# Altium PCB PCB_all.PcbDoc (part 4 of 5)
Units mm, origin at the board's own origin, x right, y up, seen from the top; angles counter-clockwise.
Board outline 345 x 232.5 mm, 2 copper layers (Top Layer, Bottom Layer); 484 components, 419 nets, 1569 pads, 736 vias.
Unrouted connection lines stored in the file: 51.
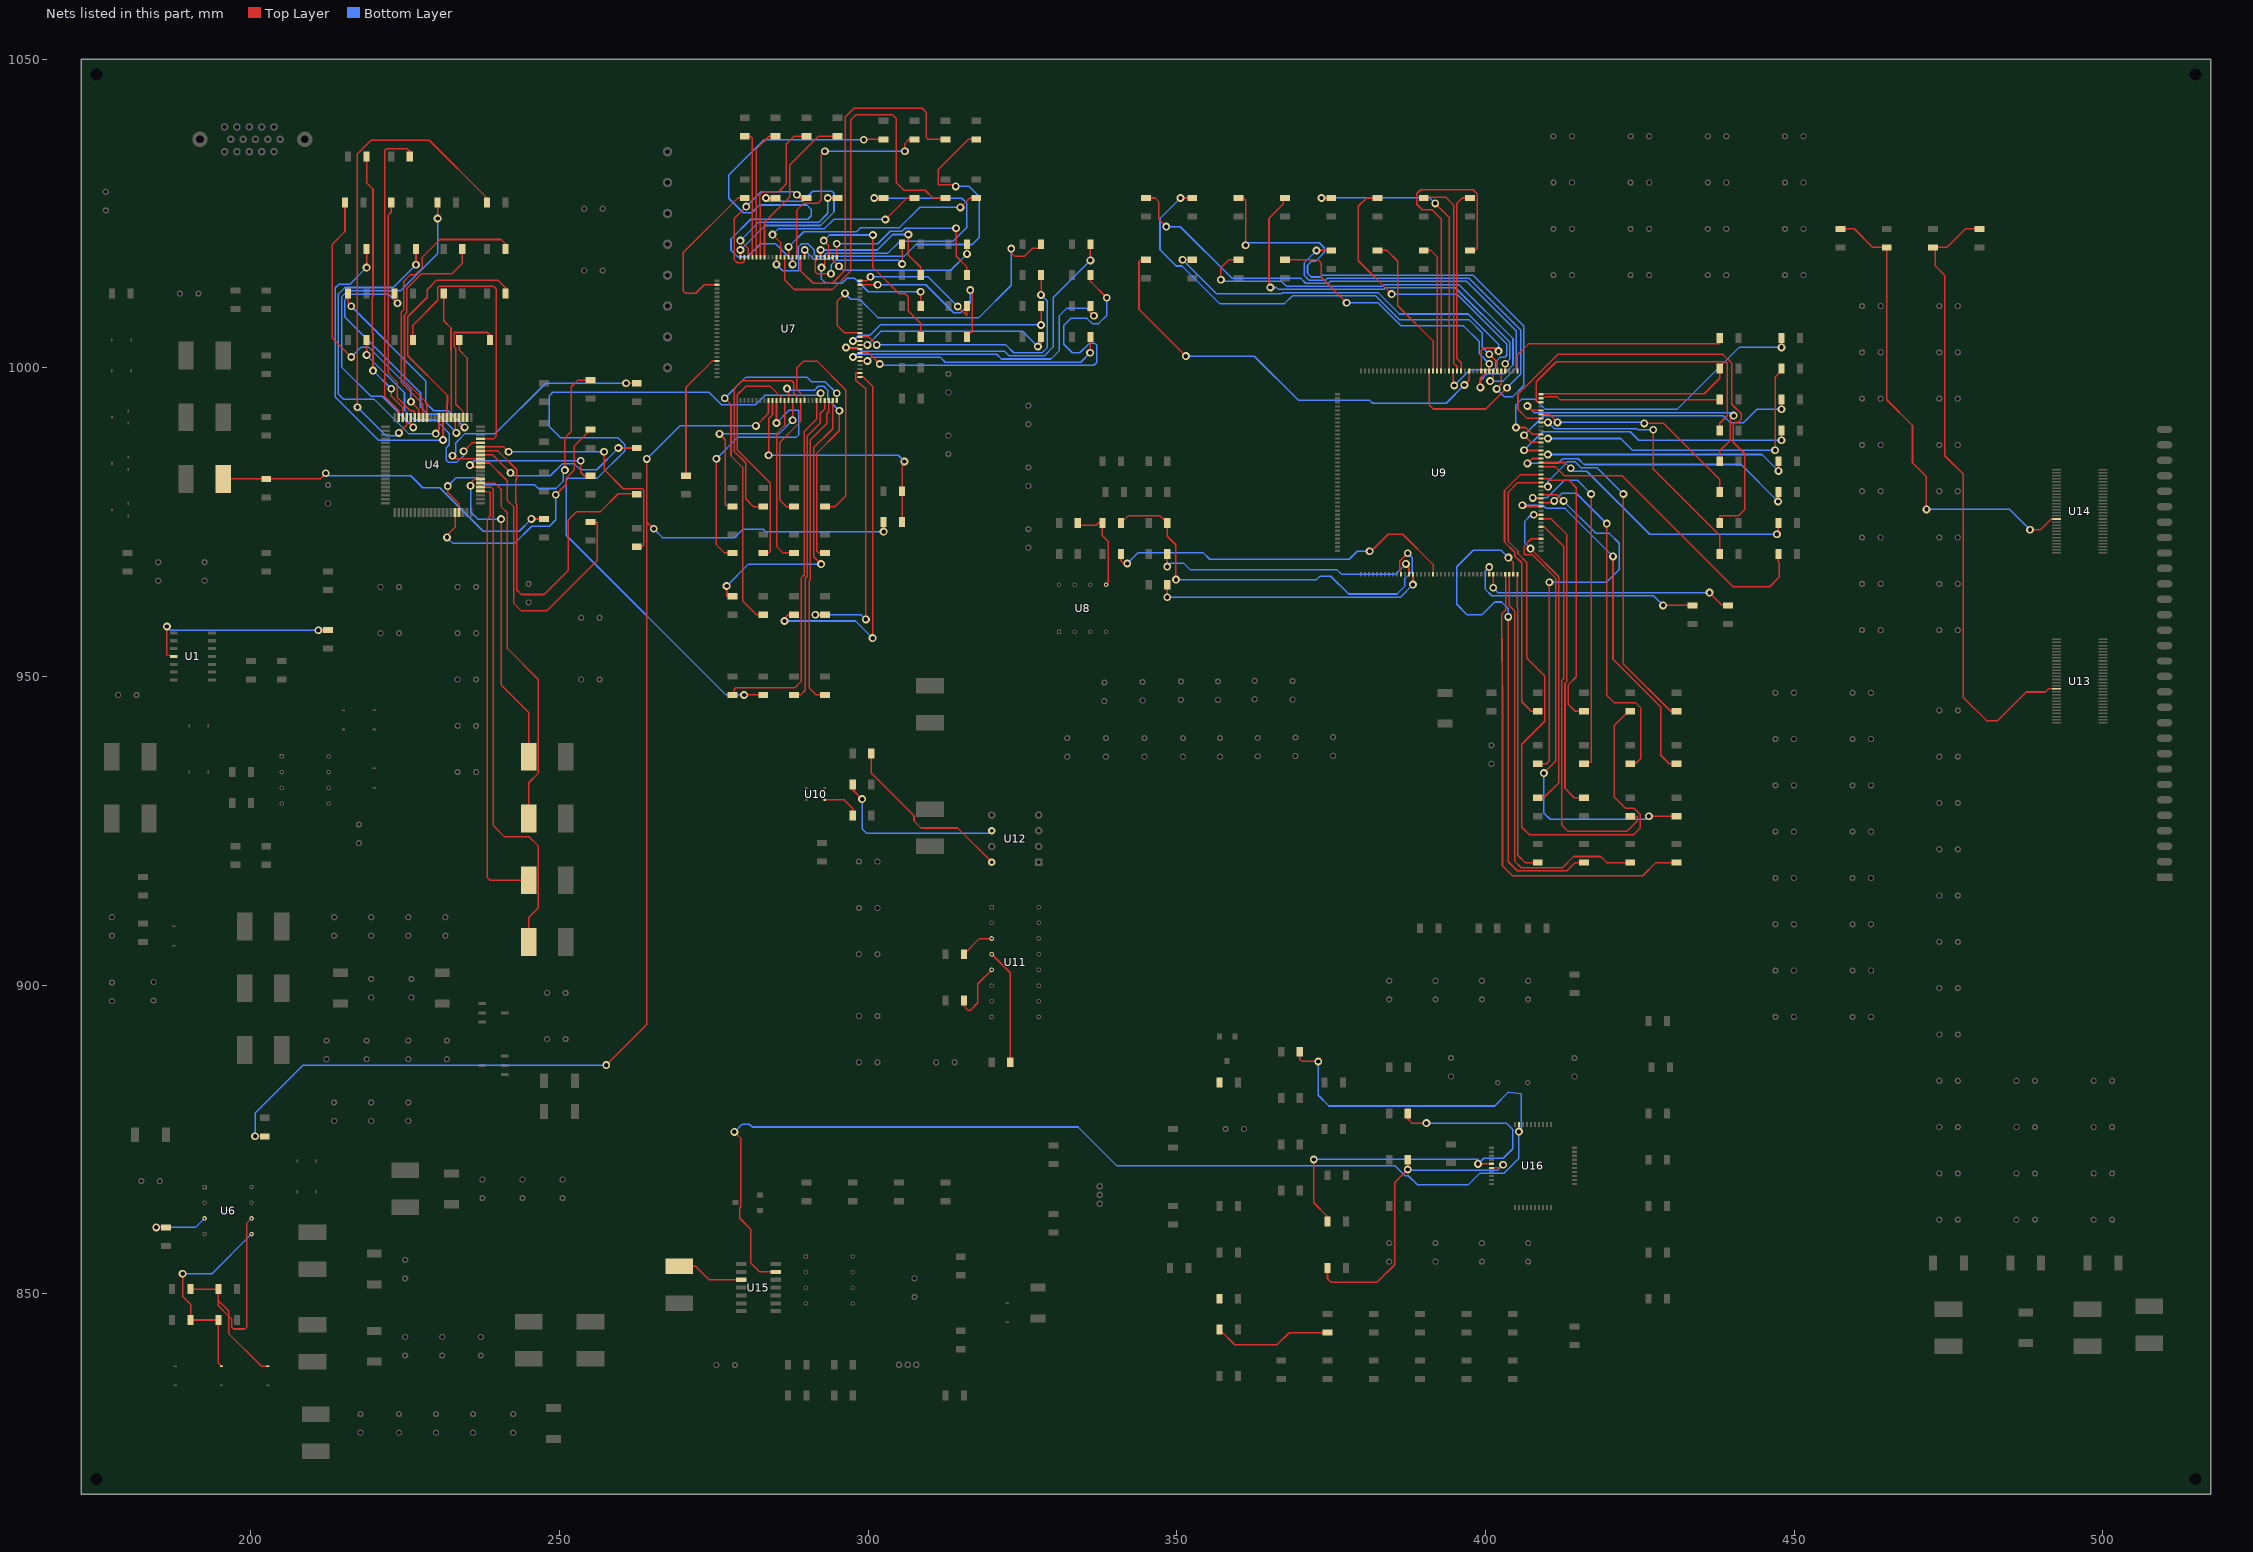
[diagram p4: the nets of this part, all layers, seen from the top]

## Via types
v1: diameter 1.27, hole 0.711, Top Layer to Bottom Layer, 736 vias

## Nets (pads, with @x,y where several pads share a name; then routed paths per layer and width w, separated by ;. In a path a pad name is that pad's centre, name@x,y a point inside that pad or via, vN(x,y) a via of type N, cw(c..) or ccw(c..) an arc to the next point about the centre after c; other vN are vias at no path point) (continued)
NetL6_2: L6.2 R17.2 R21.1 | length 57.1
  Top Layer w0.25: L6.2@195.5,982 R17.2@202.5,982 211.237,982 v1(212.141,982.904) ; v1(245.44,975.512) 245.453,975.5 R21.1@247.5,975.5
  Bottom Layer w0.25: v1(212.141,982.904) 212.524,982.521 225.882,982.521 227.836,980.567 230.607,980.567 237.642,973.531 243.459,973.531 v1(245.44,975.512)
NetL8_1: L8.1 U4.67 | length 52.3
  Top Layer w0.25: v1(235.585,980.875) 235.585,981.307 236.253,981.975 U4.67@237.222,981.975 ; v1(240.538,975.487) 240.538,948.639 245,944.177 L8.1@245,937
  Bottom Layer w0.25: v1(235.585,980.875) 235.585,976.663 236.761,975.487 v1(240.538,975.487)
NetL9_1: L9.1 U4.66 | length 60.2
  Top Layer w0.25: U4.66@237.222,981.325 239.547,981.325 240.538,980.334 240.538,977.515 241.552,976.501 241.552,954.509 246.583,949.477 246.583,934.364 245,932.781 L9.1@245,927
NetL10_1: L10.1 U4.64 | length 71
  Top Layer w0.25: U4.64@237.222,980.025 238.785,979.8 238.785,976.028 238.328,975.571 238.328,917.423 238.76,916.991 245,916.991 L10.1@245,917
NetL11_1: L11.1 U4.65 | length 81.5
  Top Layer w0.25: U4.65@237.222,980.675 238.881,980.675 239.293,980.262 239.293,925.805 241.097,924.001 245.11,924.001 246.583,922.528 246.583,912.529 245,910.946 L11.1@245,907
NetL24_2: L24.2 U15.3 | length 10.9
  Top Layer w0.25: L24.2@269.4,854.46 272.009,854.46 274.199,852.27 U15.3@279.4,852.27
NetR11_1: R11.1 U1.4 | length 32.1
  Top Layer w0.25: v1(186.392,958.088) 186.392,953.516 U1.4@187.5,953.23 ; v1(210.947,957.478) 210.969,957.5 R11.1@212.5,957.5
  Bottom Layer w0.25: v1(186.392,958.088) 187.001,957.478 v1(210.947,957.478)
NetR23_2: R23.2 U4.57 | length 44.9
  Top Layer w0.25: v1(231.902,980.821) 231.902,979.805 233.725,977.982 U4.57@233.725,976.528 ; v1(250.876,983.412) 250.876,988.622 251.907,989.654 251.907,996.923 252.984,998 R23.2@255,998
  Bottom Layer w0.25: v1(231.902,980.821) 233.284,982.203 236.743,982.203 237.932,981.014 245.976,981.014 246.55,980.44 249.428,980.44 250.579,981.591 250.579,983.115 v1(250.876,983.412)
NetR24_2: R24.2 U4.56 | length 41.3
  Top Layer w0.25: v1(231.775,972.515) 231.775,972.866 233.075,974.166 U4.56@233.075,976.528 ; v1(249.377,979.424) 251.083,981.13 251.083,982.125 252.4,983.442 252.4,987.323 254.711,989.635 254.711,990 R24.2@255,990
  Bottom Layer w0.25: v1(231.775,972.515) 232.74,971.55 242.722,971.55 245.516,974.344 248.361,974.344 249.377,975.36 v1(249.377,979.424)
NetR25_1: R25.1 U4.70 | length 23.8
  Top Layer w0.25: v1(235.483,984.225) 235.783,983.925 U4.70@237.222,983.925 ; v1(253.441,984.93) 253.441,983.059 254,982.5 R25.1@255,982.5
  Bottom Layer w0.25: v1(235.483,984.225) 236.189,984.93 v1(253.441,984.93)
NetR26_1: R26.1 U4.71 | length 50.5
  Top Layer w0.25: U4.71@237.222,984.575 238.67,984.575 241.551,981.694 241.551,978.518 242.56,977.509 242.56,961.897 243.84,960.617 247.918,960.617 256.134,968.832 256.134,975 R26.1@255,975
NetR27_1: R27.1 U4.72 | length 40.4
  Top Layer w0.25: v1(232.664,985.749) 233.172,985.241 236.601,985.241 236.601,985.225 U4.72@237.222,985.225 ; v1(260.782,997.5) R27.1@262.5,997.5
  Bottom Layer w0.25: v1(232.664,985.749) 233.172,986.257 233.172,987.816 234.688,989.332 239.584,989.332 247.752,997.5 v1(260.782,997.5)
NetR28_1: R28.1 U4.73 | length 29.3
  Top Layer w0.25: U4.73@237.222,985.875 239.167,985.875 v1(242.062,982.98) ; v1(259.537,987) R28.1@262.5,987
  Bottom Layer w0.25: v1(242.062,982.98) 242.554,982.488 248.506,982.488 250.444,984.426 252.44,984.426 253.378,983.488 256.025,983.488 v1(259.537,987)
NetR29_1: R29.1 U4.74 | length 58.1
  Top Layer w0.25: U4.74@237.222,986.525 240.039,986.525 243.076,983.488 243.076,982.022 242.9,981.846 242.9,978.013 243.064,977.849 243.064,964.048 243.84,963.272 247.515,963.272 251.435,967.192 251.435,975.36 252.781,976.706 256.642,976.706 259.51,979.574 261.825,979.574 261.825,979.5 R29.1@262.5,979.5
NetR30_1: R30.1 U4.75 | length 41.1
  Top Layer w0.25: U4.75@237.222,987.175 240.966,987.175 v1(241.757,986.384) ; v1(257.226,986.384) 257.226,983.511 260.321,980.417 263.396,980.417 263.627,980.186 263.627,971.296 263.331,971 R30.1@262.5,971
  Bottom Layer w0.25: v1(241.757,986.384) v1(257.226,986.384)
NetR31_1: R31.1 U4.76 | length 34.7
  Top Layer w0.25: v1(218.75,1002.081) R31.1@218.75,1004.5 ; v1(234.467,986.485) 235.807,987.825 U4.76@237.222,987.825
  Bottom Layer w0.25: v1(218.75,1002.081) 224.892,995.939 224.892,993.14 226.492,991.54 229.972,991.54 232.156,989.355 232.156,987.527 231.648,987.019 231.648,985.018 232.007,984.659 233.321,984.659 234.467,985.805 v1(234.467,986.485)
NetR32_1: R32.1 U4.77 | length 46.4
  Top Layer w0.25: R32.1@226.25,1004.5 226.25,1006.894 230.276,1010.92 230.276,1012.952 230.556,1013.231 239.268,1013.231 239.72,1012.779 239.72,988.893 239.302,988.475 U4.77@237.222,988.475
NetR33_1: R33.1 U4.2 | length 13.1
  Top Layer w0.25: R33.1@233.75,1004.5 233.75,1002.874 235.025,1001.599 U4.2@235.025,991.972
NetR34_1: R34.1 U4.3 | length 21.2
  Top Layer w0.25: U4.3@234.375,991.972 234.375,992.902 233.172,994.105 233.172,1003.129 232.925,1003.376 232.925,1005.713 238.369,1005.713 238.75,1005.332 R34.1@238.75,1004.5
NetR35_1: R35.1 U4.4 | length 33.1
  Top Layer w0.25: R35.1@215.75,1012 215.75,1010.46 v1(216.256,1009.955) ; U4.4@233.725,991.972 233.725,990.733 234.112,990.346 v1(234.62,990.346)
  Bottom Layer w0.25: v1(216.256,1009.955) 228.346,997.864 228.346,994.308 229.616,993.038 231.927,993.038 v1(234.62,990.346)
NetR36_1: R36.1 U4.5 | length 43.9
  Top Layer w0.25: R36.1@223.25,1012 223.25,1010.936 v1(223.749,1010.437) ; U4.5@233.075,991.972 233.075,989.681 v1(233.299,989.457)
  Bottom Layer w0.25: v1(223.749,1010.437) 222.251,1011.935 216.208,1011.935 215.242,1010.969 215.242,1008.197 227.482,995.956 227.482,993.623 228.6,992.505 230.251,992.505 v1(233.299,989.457)
NetR37_1: R37.1 U4.6 | length 20.5
  Top Layer w0.25: R37.1@231.25,1012 231.25,1007.618 232.421,1006.447 232.421,1002.871 232.425,1002.867 U4.6@232.425,991.972
NetR38_1: R38.1 U4.7 | length 39.5
  Top Layer w0.25: U4.7@231.775,991.972 231.775,994.207 231.855,994.287 231.855,995.491 225.4,1001.947 225.4,1008.253 228.556,1011.41 228.556,1012.629 230.124,1014.197 240.005,1014.197 241.25,1012.952 R38.1@241.25,1012
NetR39_1: R39.1 U4.8 | length 51.1
  Top Layer w0.25: v1(218.75,1016.229) R39.1@218.75,1019.25 ; v1(231.125,988.289) U4.8@231.125,991.972
  Bottom Layer w0.25: v1(218.75,1016.229) 216.023,1013.502 214.238,1013.502 213.688,1012.952 213.688,995.25 220.65,988.289 v1(231.125,988.289)
NetR40_1: R40.1 U4.9 | length 54.6
  Top Layer w0.25: v1(226.75,1016.686) R40.1@226.75,1019.25 ; v1(229.948,989.332) 230.475,989.859 U4.9@230.475,991.972
  Bottom Layer w0.25: v1(226.75,1016.686) 223.062,1012.998 215.246,1012.998 214.192,1011.944 214.192,995.709 215.029,994.873 220.011,994.873 225.552,989.332 v1(229.948,989.332)
NetR41_1: R41.1 U4.12 | length 35.5
  Top Layer w0.25: U4.12@228.525,991.972 228.525,994.307 224.892,997.941 224.892,1008.544 225.267,1008.919 225.267,1012.824 227.651,1015.209 232.584,1015.209 234.25,1016.875 R41.1@234.25,1019.25
NetR42_1: R42.1 U4.13 | length 45
  Top Layer w0.25: U4.13@227.875,991.972 227.875,994.094 224.384,997.585 224.384,1009.044 224.763,1009.423 224.763,1013.968 225.88,1015.086 226.616,1015.086 227.787,1016.257 227.787,1017.93 230.632,1020.775 240.539,1020.775 241.25,1020.064 R42.1@241.25,1019.25
NetR43_1: R43.1 U4.14 | length 45.3
  Top Layer w0.25: R43.1@215.25,1026.75 215.25,1022.059 213.216,1020.025 213.216,1004.79 v1(216.256,1001.751) ; v1(225.933,994.486) 227.225,993.194 U4.14@227.225,991.972
  Bottom Layer w0.25: v1(216.256,1001.751) 217.805,1003.3 219.126,1003.3 225.933,996.493 v1(225.933,994.486)
NetR44_1: R44.1 U4.15 | length 37.1
  Top Layer w0.25: R44.1@222.75,1026.75 222.75,1025.195 222.225,1024.669 222.225,999.13 223.747,997.608 223.747,995.126 225.834,993.038 226.314,993.038 226.575,992.777 U4.15@226.575,991.972
NetR45_1: R45.1 U4.16 | length 55.5
  Top Layer w0.25: U4.16@225.925,991.972 225.925,990.735 v1(226.314,990.346) ; v1(230.25,1024.179) R45.1@230.25,1026.75
  Bottom Layer w0.25: v1(226.314,990.346) 221.283,995.377 219.456,995.377 214.696,1000.136 214.696,1011.473 215.662,1012.439 224.205,1012.439 230.25,1018.484 v1(230.25,1024.179)
NetR46_1: R46.1 U4.17 | length 79.6
  Top Layer w0.25: v1(217.272,993.597) 217.272,1010.417 217.228,1010.461 217.228,1034.625 219.456,1036.853 228.903,1036.853 238.25,1027.506 R46.1@238.25,1026.75 ; v1(223.977,989.457) 225.275,990.755 U4.17@225.275,991.972
  Bottom Layer w0.25: v1(217.272,993.597) 221.92,988.949 223.596,988.949 223.977,989.33 v1(223.977,989.457)
NetR47_1: R47.1 U4.18 | length 44.8
  Top Layer w0.25: R47.1@218.75,1034.25 218.75,1029.965 219.786,1028.929 219.786,1011.53 219.685,1011.428 219.685,1005.662 219.786,1005.561 v1(219.786,999.541) ; v1(222.733,996.594) 222.733,995.427 224.625,993.534 U4.18@224.625,991.972
  Bottom Layer w0.25: v1(219.786,999.541) v1(222.733,996.594)
NetR48_1: R48.1 U4.19 | length 49.3
  Top Layer w0.25: U4.19@223.975,991.972 223.975,993.038 221.717,995.297 221.717,1035.228 221.996,1035.507 225.298,1035.507 225.75,1035.055 R48.1@225.75,1034.25
NetR49_2: R49.2 U6.3 | length 10
  Top Layer w0.25: v1(184.683,860.755) 184.689,860.75 R49.2@186.25,860.75
  Bottom Layer w0.25: v1(184.683,860.755) 191.045,860.755 U6.3@192.5,862.21
NetR50_1: R50.1 R52.2 U6.6 ZD7.2 | length 46.7
  Top Layer w0.25: R50.1@190.25,850.75 R52.2@194.75,850.75 194.75,848.885 ; U6.6@200.12,862.21 199.365,861.455 199.365,844.626 199.034,844.296 197.206,844.296 196.901,844.601 196.901,845.904 196.393,846.412 ; ZD7.2@202.75,838.25 201.713,838.25 196.393,843.57 196.393,846.412 ; 194.75,848.885 194.75,848.055 196.393,846.412 ; 194.75,848.885 196.393,847.242 196.393,846.412
NetR51_1: R51.1 R53.2 U6.5 ZD8.2 | length 34.1
  Top Layer w0.25: v1(188.951,853.237) 188.951,849.558 190.25,848.258 R51.1@190.25,845.75 R53.2@194.75,845.75 194.75,838.75 ZD8.2@195.25,838.25
  Bottom Layer w0.25: v1(188.951,853.237) 193.687,853.237 U6.5@200.12,859.67
NetR54_1: R54.1 U7.77 | length 26
  Top Layer w0.25: U7.77@275.5,1013.45 273.458,1013.45 272.078,1012.07 270.424,1012.07 270.05,1012.444 270.05,1018.658 278.892,1027.5 R54.1@280,1027.5
NetR55_1: R55.1 U7.75 | length 35.5
  Top Layer w0.25: U7.75@279.3,1017.9 v1(279.3,1019.073) ; v1(283.439,1027.506) 283.445,1027.5 R55.1@285,1027.5
  Bottom Layer w0.25: v1(279.3,1019.073) 283.272,1023.046 292.262,1023.046 294.462,1025.246 294.462,1028.243 294.132,1028.573 291.008,1028.573 289.408,1026.973 283.972,1026.973 v1(283.439,1027.506)
NetR56_1: R56.1 R62.2 U7.8 | length 232.9
  Top Layer w0.25: v1(200.685,875.513) 200.698,875.5 R56.1@202.25,875.5 ; v1(257.556,887.044) 264.135,893.623 264.135,975.03 ; v1(264.135,985.241) 264.135,975.03 ; v1(265.252,973.912) 264.135,975.03 ; v1(281.813,990.575) 283.85,992.612 U7.8@283.85,994.7 ; v1(302.489,973.455) 302.5,973.466 R62.2@302.5,975
  Bottom Layer w0.25: v1(200.685,875.513) 200.685,879.246 208.483,887.044 v1(257.556,887.044) ; v1(264.135,985.241) 269.469,990.575 v1(281.813,990.575) ; v1(265.252,973.912) 266.675,972.49 278.384,972.49 279.73,973.836 282.981,973.836 283.362,973.455 v1(302.489,973.455)
NetR57_1: R57.1 R62.1 U7.9 | length 41.5
  Top Layer w0.25: v1(283.87,985.825) 283.87,991.755 284.5,992.384 U7.9@284.5,994.7 ; R62.1@305.5,975 R57.1@305.5,980 305.5,984.442 v1(305.867,984.809)
  Bottom Layer w0.25: v1(283.87,985.825) 304.851,985.825 v1(305.867,984.809)
NetR58_1: R58.1 U7.74 | length 23.2
  Top Layer w0.25: U7.74@279.95,1017.9 279.95,1017.27 279.696,1017.016 278.79,1017.016 278.282,1017.524 278.282,1024.153 v1(280.238,1026.109) ; v1(288.442,1028.014) 288.957,1027.5 R58.1@290,1027.5
  Bottom Layer w0.25: v1(280.238,1026.109) 282.651,1028.522 287.934,1028.522 v1(288.442,1028.014)
NetR59_2: R59.2 U7.96 | length 21.1
  Top Layer w0.25: R59.2@270.5,982.5 270.485,982.5 270.485,996.823 274.762,1001.1 U7.96@275.5,1001.1
NetR60_1: R60.1 U7.73 | length 23.3
  Top Layer w0.25: v1(279.298,1020.597) 280.6,1019.296 U7.73@280.6,1017.9 ; v1(293.446,1027.5) R60.1@295,1027.5
  Bottom Layer w0.25: v1(279.298,1020.597) 282.251,1023.55 291.984,1023.55 293.446,1025.012 v1(293.446,1027.5)
NetR61_1: R61.1 U7.72 | length 20.7
  Top Layer w0.25: R61.1@280,1037.5 280.924,1037.5 281.252,1037.172 281.252,1025.097 281.25,1025.095 U7.72@281.25,1017.9
NetR63_1: R63.1 U7.71 | length 21.5
  Top Layer w0.25: U7.71@281.9,1017.9 281.9,1035.428 283.972,1037.5 R63.1@285,1037.5
NetR64_1: R64.1 U7.70 | length 25.5
  Top Layer w0.25: U7.70@282.55,1017.9 282.55,1026.365 282.425,1026.49 282.425,1027.991 282.956,1028.522 285.496,1028.522 286.73,1029.756 286.73,1036.233 287.997,1037.5 R64.1@290,1037.5
NetR65_1: R65.1 U7.69 | length 26.3
  Top Layer w0.25: U7.69@283.2,1017.9 283.2,1023.559 287.325,1027.684 287.325,1032.891 291.934,1037.5 R65.1@295,1037.5
NetR66_1: R66.1 U7.17 | length 37.4
  Top Layer w0.25: U7.17@289.7,994.7 289.7,995.184 288.462,996.422 288.462,999.992 289.56,1001.09 291.694,1001.09 296.342,996.442 296.342,979.202 294.64,977.5 R66.1@293,977.5
NetR67_1: R67.1 U7.16 | length 20.3
  Top Layer w0.25: R67.1@288,977.5 286.754,977.5 285.662,978.592 285.662,987.911 289.05,991.299 U7.16@289.05,994.7
NetR68_1: R68.1 U7.15 | length 35.4
  Top Layer w0.25: R68.1@283,977.5 281.432,977.5 280.154,978.778 280.154,984.612 278.282,986.484 278.282,996.625 279.546,997.888 287.634,997.888 287.954,997.568 287.954,995.87 288.4,995.424 U7.15@288.4,994.7
NetR69_1: R69.1 U7.14 | length 29
  Top Layer w0.25: v1(275.92,989.279) 276.86,988.339 276.86,977.754 R69.1@278,977.5 ; U7.14@287.75,994.7 287.75,991.496 v1(287.757,991.489)
  Bottom Layer w0.25: v1(275.92,989.279) 285.547,989.279 v1(287.757,991.489)
NetR70_1: R70.1 U7.13 | length 39.1
  Top Layer w0.25: v1(286.842,996.62) 287.1,996.362 U7.13@287.1,994.7 ; R70.1@293,970 291.974,970 291.694,970.28 291.694,986.18 295.326,989.813 v1(295.326,993.038)
  Bottom Layer w0.25: v1(286.842,996.62) 287.096,996.366 291.286,996.366 291.927,997.007 292.805,997.007 293.422,996.39 293.422,994.942 v1(295.326,993.038)
NetR71_1: R71.1 U7.12 | length 27.5
  Top Layer w0.25: U7.12@286.45,994.7 286.45,990.632 285.158,989.34 285.158,971.05 286.208,970 R71.1@288,970
NetR72_1: R72.1 U7.11 | length 37.7
  Top Layer w0.25: R72.1@283,970 283.87,970 284.15,970.28 284.15,981.329 278.786,986.692 278.786,995.617 280.152,996.982 284.17,996.982 285.8,995.352 U7.11@285.8,994.7
NetR73_1: R73.1 U7.10 | length 44.2
  Top Layer w0.25: v1(275.412,985.266) 275.412,971.296 276.708,970 R73.1@278,970 ; v1(285.14,991.054) 285.15,991.064 U7.10@285.15,994.7
  Bottom Layer w0.25: v1(275.412,985.266) 278.917,988.771 288.366,988.771 288.773,989.178 288.773,993.113 287.226,993.14 v1(285.14,991.054)
NetR74_1: R74.1 U7.66 | length 60.5
  Top Layer w0.25: v1(285.14,1016.737) 285.15,1016.746 U7.66@285.15,1017.9 ; v1(300.989,1027.506) 300.995,1027.5 R74.1@302.5,1027.5
  Bottom Layer w0.25: v1(285.14,1016.737) 286.154,1015.723 288.747,1015.723 288.773,1015.748 288.773,1017.905 288.696,1017.981 288.696,1019.556 289.23,1020.089 290.245,1020.089 291.286,1019.048 291.286,1018.365 291.592,1018.059 292.788,1018.059 293.298,1018.569 303.202,1018.569 305.099,1020.466 313.707,1020.466 315.951,1022.71 315.951,1026.668 315.157,1027.462 301.033,1027.462 v1(300.989,1027.506)
NetR75_1: R75.1 U7.65 | length 29.7
  Top Layer w0.25: v1(284.505,1021.568) 285.8,1020.273 U7.65@285.8,1017.9 ; v1(302.787,1024.02) 306.267,1027.5 R75.1@307.5,1027.5
  Bottom Layer w0.25: v1(284.505,1021.568) 285.479,1022.542 292.936,1022.542 294.414,1024.02 v1(302.787,1024.02)
NetR76_1: R76.1 U7.64 | length 68.1
  Top Layer w0.25: U7.64@286.45,1017.9 286.45,1014.265 288.036,1012.679 294.202,1012.679 297.18,1015.656 297.18,1040.13 298.069,1041.019 303.911,1041.019 304.546,1040.384 304.546,1030.021 305.816,1028.751 309.248,1028.751 310.499,1027.5 R76.1@312.5,1027.5
NetR77_1: R77.1 U7.63 | length 35.4
  Top Layer w0.25: U7.63@287.1,1017.9 v1(287.1,1019.581) ; v1(314.935,1025.976) 316.459,1027.5 R77.1@317.5,1027.5
  Bottom Layer w0.25: v1(287.1,1019.581) 289.556,1022.038 298.124,1022.038 298.789,1022.703 305.089,1022.703 308.362,1025.976 v1(314.935,1025.976)
NetR78_1: R78.1 U7.62 | length 78
  Top Layer w0.25: v1(287.75,1016.737) U7.62@287.75,1017.9 ; v1(299.269,1036.93) 299.339,1037 R78.1@302.5,1037
  Bottom Layer w0.25: v1(287.75,1016.737) 287.75,1017.327 284.988,1020.089 282.595,1020.089 280.509,1018.003 278.823,1018.003 277.778,1019.048 277.778,1020.855 280.977,1024.054 290.193,1024.054 290.775,1024.636 290.775,1025.656 290.068,1026.363 282.403,1026.363 281.135,1025.095 279.779,1025.095 277.419,1027.455 277.419,1031.24 283.108,1036.93 v1(299.269,1036.93)
NetR79_1: R79.1 U7.61 | length 36.5
  Top Layer w0.25: U7.61@288.4,1017.9 288.4,1025.483 289.585,1026.668 291.897,1026.668 292.405,1027.176 292.405,1034.491 v1(292.989,1035.075) ; v1(305.943,1035.075) 305.943,1036.32 306.623,1037 R79.1@307.5,1037
  Bottom Layer w0.25: v1(292.989,1035.075) v1(305.943,1035.075)
NetR80_1: R80.1 U7.60 | length 57.2
  Top Layer w0.25: U7.60@289.05,1017.9 289.05,1015.723 291.086,1013.687 294.164,1013.687 296.291,1015.814 296.291,1040.638 297.688,1042.035 308.737,1042.035 309.372,1041.4 309.372,1037.305 309.677,1037 R80.1@312.5,1037
NetR81_1: R81.1 U7.59 | length 56.2
  Top Layer w0.25: U7.59@289.7,1017.9 289.712,1018.73 v1(289.712,1019.073) ; v1(314.173,1029.386) 313.893,1029.665 311.353,1029.665 311.353,1032.104 316.25,1037 R81.1@317.5,1037
  Bottom Layer w0.25: v1(289.712,1019.073) 291.236,1017.549 293.7,1017.549 294.183,1018.032 305.816,1018.032 307.746,1019.962 316.865,1019.962 317.983,1021.08 317.983,1027.735 316.332,1029.386 v1(314.173,1029.386)
NetR82_1: R82.1 U7.27 | length 51.5
  Top Layer w0.25: v1(291.44,960) R82.1@293,960 ; U7.27@298.7,999.15 297.967,999.15 297.967,997.996 299.618,996.61 v1(299.618,959.231)
  Bottom Layer w0.25: v1(291.44,960) 298.849,960 v1(299.618,959.231)
NetR83_1: R83.1 U7.26 | length 61.1
  Top Layer w0.25: v1(286.436,958.977) 286.436,959.416 287.02,960 R83.1@288,960 ; U7.26@298.7,998.5 299.212,998.5 300.711,997.001 v1(300.711,956.208)
  Bottom Layer w0.25: v1(286.436,958.977) 297.942,958.977 v1(300.711,956.208)
NetR84_1: R84.1 U7.25 | length 60
  Top Layer w0.25: v1(276.758,995.07) 277.778,994.05 277.778,985.72 279.65,983.848 279.65,962.276 281.926,960 R84.1@283,960 ; v1(294.894,995.858) 294.9,995.852 U7.25@294.9,994.7
  Bottom Layer w0.25: v1(276.758,995.07) 280.13,998.442 290.126,998.442 290.83,997.737 293.014,997.737 v1(294.894,995.858)
NetR85_1: R85.1 U7.24 | length 47.6
  Top Layer w0.25: v1(277.075,964.653) 277.075,963 R85.1@278,963 ; v1(292.379,968.197) 291.186,969.391 291.186,987.069 294.25,990.134 U7.24@294.25,994.7
  Bottom Layer w0.25: v1(277.075,964.653) 280.619,968.197 v1(292.379,968.197)
NetR86_1: R86.1 U7.23 | length 50.9
  Top Layer w0.25: R86.1@293,947 291.592,947 290.424,948.168 290.424,965.41 290.64,965.626 290.64,988.328 293.268,990.956 293.268,992.556 293.6,992.887 U7.23@293.6,994.7
NetR87_1: R87.1 U7.22 | length 50.4
  Top Layer w0.25: R87.1@288,947 289.052,947 289.814,947.762 289.814,965.914 290.136,966.236 290.136,988.936 292.232,991.032 292.232,992.622 292.95,993.34 U7.22@292.95,994.7
NetR88_1: R88.1 U7.21 | length 129.4
  Top Layer w0.25: v1(279.908,947) R88.1@283,947 ; U7.21@292.3,994.7 v1(292.3,995.858)
  Bottom Layer w0.25: v1(279.908,947) 276.95,947 251.083,972.867 251.083,981.748 251.46,982.125 256.142,982.125 260.553,986.536 260.553,987.552 259.461,988.644 250.165,988.644 248.336,990.473 248.336,995.438 248.92,996.022 274.232,996.022 276.276,993.978 281.711,993.978 283.276,995.543 291.985,995.543 v1(292.3,995.858)
NetR89_1: R89.1 U7.20 | length 59.1
  Top Layer w0.25: R89.1@278,947 278.308,947 278.308,947.928 278.55,948.17 288.126,948.17 289.128,949.173 289.128,965.962 289.632,966.466 289.632,989.662 291.65,991.68 U7.20@291.65,994.7
NetR90_1: R90.1 U7.56 | length 21.9
  Top Layer w0.25: U7.56@291.65,1017.9 291.65,1017.476 291.416,1017.243 291.416,1015.492 291.694,1015.215 v1(293.98,1015.215) ; v1(305.5,1016.813) R90.1@305.5,1020
  Bottom Layer w0.25: v1(293.98,1015.215) 293.98,1016.66 294.765,1017.446 304.867,1017.446 v1(305.5,1016.813)
NetR91_1: R91.1 U7.55 | length 23.8
  Top Layer w0.25: U7.55@292.3,1017.9 v1(292.3,1019.073) ; v1(306.502,1021.588) 306.502,1018.261 308.5,1016.262 R91.1@308.5,1015
  Bottom Layer w0.25: v1(292.3,1019.073) 301.48,1019.073 303.995,1021.588 v1(306.502,1021.588)
NetR92_1: R92.1 U7.54 | length 23.6
  Top Layer w0.25: v1(292.43,1016.229) 292.95,1016.748 U7.54@292.95,1017.9 ; R92.1@308.5,1010 v1(308.5,1012.317)
  Bottom Layer w0.25: v1(292.43,1016.229) 292.43,1014.376 293.116,1013.691 295.735,1013.691 296.52,1014.476 297.837,1014.476 299.996,1012.317 v1(308.5,1012.317)
NetR93_1: R93.1 U7.53 | length 31.7
  Top Layer w0.25: v1(292.811,1020.597) 293.6,1019.809 U7.53@293.6,1017.9 ; v1(300.769,1021.504) 300.769,1016.229 305.003,1011.996 306.01,1011.996 306.474,1011.532 306.474,1009.212 308.5,1007.186 R93.1@308.5,1005
  Bottom Layer w0.25: v1(292.811,1020.597) 293.718,1021.504 v1(300.769,1021.504)
NetR94_1: R94.1 U7.52 | length 25.5
  Top Layer w0.25: U7.52@294.25,1017.9 294.25,1017.448 v1(295.266,1016.432) ; v1(316,1018.437) R94.1@316,1020
  Bottom Layer w0.25: v1(295.266,1016.432) 295.899,1015.799 313.362,1015.799 v1(316,1018.437)
NetR95_1: R95.1 U7.51 | length 30.9
  Top Layer w0.25: v1(294.894,1020.089) 294.9,1020.083 U7.51@294.9,1017.9 ; v1(314.249,1022.602) 314.249,1018.056 316,1016.305 R95.1@316,1015
  Bottom Layer w0.25: v1(294.894,1020.089) 301.549,1020.089 303.555,1022.096 305.49,1022.096 305.996,1022.602 v1(314.249,1022.602)
NetR96_1: R96.1 U7.50 | length 21.7
  Top Layer w0.25: U7.50@298.7,1014.1 299.75,1014.1 v1(300.38,1014.73) ; v1(314.503,1009.929) 316,1008.432 R96.1@316,1010
  Bottom Layer w0.25: v1(300.38,1014.73) 309.702,1014.73 v1(314.503,1009.929)
NetR97_1: R97.1 U7.49 | length 31
  Top Layer w0.25: U7.49@298.7,1013.45 v1(301.523,1013.45) ; R97.1@316,1005 316,1005.738 316.84,1005.738 316.84,1012.266 v1(316.535,1012.571)
  Bottom Layer w0.25: v1(301.523,1013.45) 309.306,1013.45 313.842,1008.913 314.96,1008.913 316.535,1010.488 v1(316.535,1012.571)
NetR100_1: R100.1 U7.37 | length 53.5
  Top Layer w0.25: v1(296.24,1012.038) 294.996,1010.793 294.996,1006.856 296.202,1005.65 U7.37@298.7,1005.65 ; v1(323.164,1019.294) 323.164,1018.64 323.772,1018.032 325.296,1018.032 326.617,1019.353 328,1019.353 R100.1@328,1020
  Bottom Layer w0.25: v1(296.24,1012.038) 297.18,1011.098 298.602,1011.098 301.574,1008.126 317.932,1008.126 323.164,1013.358 v1(323.164,1019.294)
NetR101_1: R101.1 U7.36 | length 43.9
  Top Layer w0.25: U7.36@298.7,1005 300.103,1005 v1(301.396,1003.706) ; v1(328,1011.809) R101.1@328,1015
  Bottom Layer w0.25: v1(301.396,1003.706) 322.312,1003.706 323.596,1002.423 328.168,1002.423 329.032,1003.286 329.032,1010.777 v1(328,1011.809)
NetR102_1: R102.1 U7.35 | length 35.8
  Top Layer w0.25: v1(297.536,1004.341) 297.544,1004.35 U7.35@298.7,1004.35 ; v1(328,1006.932) R102.1@328,1010
  Bottom Layer w0.25: v1(297.536,1004.341) 298.475,1005.281 300.304,1005.281 301.955,1006.932 v1(328,1006.932)
NetR103_1: R103.1 U7.34 | length 32.5
  Top Layer w0.25: U7.34@298.7,1003.7 v1(299.872,1003.7) ; v1(327.482,1003.437) 328,1003.955 R103.1@328,1005
  Bottom Layer w0.25: v1(299.872,1003.7) 302.089,1005.916 325.003,1005.916 v1(327.482,1003.437)
NetR104_1: R104.1 U7.33 | length 56.2
  Top Layer w0.25: v1(296.402,1003.275) 296.627,1003.05 U7.33@298.7,1003.05 ; v1(336,1017.397) R104.1@336,1020
  Bottom Layer w0.25: v1(296.402,1003.275) 298.268,1003.275 298.856,1002.686 322.076,1002.686 322.844,1001.919 328.514,1001.919 329.946,1003.351 329.946,1011.343 v1(336,1017.397)
NetR105_1: R105.1 U7.32 | length 67.8
  Top Layer w0.25: U7.32@298.7,1002.4 300.086,1002.4 v1(301.878,1000.608) ; R105.1@336,1015 336,1013.968 v1(338.633,1011.335)
  Bottom Layer w0.25: v1(301.878,1000.608) 302.086,1000.4 336.546,1000.4 337.007,1000.862 337.007,1003.677 336.735,1003.949 335.789,1003.949 334.264,1002.424 333.057,1002.424 331.673,1003.808 331.673,1006.856 332.816,1007.999 335.458,1007.999 336.296,1007.161 337.312,1007.161 338.633,1008.482 v1(338.633,1011.335)
NetR106_1: R106.1 U7.31 | length 49.7
  Top Layer w0.25: v1(297.536,1001.75) U7.31@298.7,1001.75 ; R106.1@336,1010 336,1008.981 v1(336.55,1008.431)
  Bottom Layer w0.25: v1(297.536,1001.75) 297.968,1002.182 320.812,1002.182 321.579,1001.415 329.602,1001.415 330.98,1002.792 330.98,1008.449 332.204,1009.672 335.308,1009.672 v1(336.55,1008.431)
NetR107_1: R107.1 U7.30 | length 41
  Top Layer w0.25: U7.30@298.7,1001.1 299.863,1001.1 v1(299.872,1001.09) ; v1(335.943,1002.427) 336,1002.484 R107.1@336,1005
  Bottom Layer w0.25: v1(299.872,1001.09) 300.46,1001.678 311.724,1001.678 312.498,1000.904 334.42,1000.904 v1(335.943,1002.427)
NetR111_2: R111.2 R117.2 U8.5 | length 15
  Top Layer w0.25: R111.2@333.95,974.85 333.95,974.496 336.944,974.496 337.298,974.85 R117.2@337.95,974.85 337.95,972.795 338.887,971.858 338.887,965.207 U8.5@338.53,964.85
NetR113_1: R113.1 R117.1 U9.11 | length 67.4
  Top Layer w0.25: R117.1@340.95,974.85 342.095,975.995 347.305,975.995 R113.1@348.45,974.85 348.45,972.694 349.811,971.333 349.811,965.731 v1(349.86,965.683) ; U9.11@386.3,966.55 386.3,966.987 386.08,967.207 386.08,968.654 v1(387.388,969.962)
  Bottom Layer w0.25: v1(349.86,965.683) 372.617,965.683 373.175,966.241 374.946,966.241 377.833,963.354 385.656,963.354 386.944,964.641 386.944,965.86 388.112,967.029 388.112,969.239 v1(387.388,969.962)
NetR114_1: R114.1 U9.13 | length 44.2
  Top Layer w0.25: v1(348.45,967.791) R114.1@348.45,969.85 ; v1(387.096,968.223) 387.6,967.719 U9.13@387.6,966.55
  Bottom Layer w0.25: v1(348.45,967.791) 348.958,968.299 351.14,968.299 352.19,967.249 375.954,967.249 376.657,966.546 385.42,966.546 v1(387.096,968.223)
NetR115_1: R115.1 U9.14 | length 44.3
  Top Layer w0.25: v1(348.45,962.838) R115.1@348.45,964.85 ; v1(388.239,964.87) 388.25,964.881 U9.14@388.25,966.55
  Bottom Layer w0.25: v1(348.45,962.838) 386.207,962.838 v1(388.239,964.87)
NetR118_1: R118.1 U9.19 | length 58.4
  Top Layer w0.25: R118.1@340.95,969.85 340.95,968.725 341.376,968.299 v1(341.966,968.299) ; v1(381.229,970.28) 381.491,970.28 384.257,973.047 386.59,973.047 391.5,968.137 U9.19@391.5,966.55
  Bottom Layer w0.25: v1(341.966,968.299) 343.736,970.069 354.231,970.069 355.335,968.965 377.913,968.965 379.228,970.28 v1(381.229,970.28)
NetR119_2: R119.2 U9.103 | length 76.3
  Top Layer w0.25: v1(372.625,1019) R119.2@375,1019 ; U9.103@390.85,999.5 390.85,994.009 391.541,993.318 400.025,993.318 v1(403.479,996.772)
  Bottom Layer w0.25: v1(372.625,1019) 370.656,1017.03 370.656,1014.91 371.37,1014.196 374.076,1014.196 374.361,1014.482 397.317,1014.482 405.689,1006.11 405.689,998.982 v1(403.479,996.772)
NetR120_2: R120.2 U9.102 | length 24.1
  Top Layer w0.25: R120.2@382.5,1019 384.048,1019 385.799,1017.249 385.799,1010.037 391.5,1004.335 U9.102@391.5,999.5
NetR121_2: R121.2 U9.101 | length 21.1
  Top Layer w0.25: R121.2@390,1019 391.16,1019 392.15,1018.01 U9.101@392.15,999.5
NetR122_2: R122.2 U9.100 | length 51.7
  Top Layer w0.25: U9.100@392.8,999.5 392.8,1024.128 391.325,1025.603 389.761,1025.603 388.874,1026.49 388.874,1028.192 389.509,1028.827 397.993,1028.827 398.628,1028.192 398.628,1019.302 398.326,1019 R122.2@397.5,1019
NetR123_2: R123.2 U9.98 | length 48.4
  Top Layer w0.25: v1(373.431,1027.506) 373.437,1027.5 R123.2@375,1027.5 ; v1(391.846,1026.617) 394.1,1024.363 U9.98@394.1,999.5
  Bottom Layer w0.25: v1(373.431,1027.506) 390.957,1027.506 v1(391.846,1026.617)
NetR124_2: R124.2 U9.97 | length 57.5
  Top Layer w0.25: R124.2@382.5,1027.5 380.74,1027.5 379.4,1026.16 379.4,1017.321 v1(384.785,1011.936) ; U9.97@394.75,999.5 394.75,997.32 v1(394.943,997.128)
  Bottom Layer w0.25: v1(384.785,1011.936) 395.34,1011.936 403.44,1003.836 403.44,1002.016 403.1,1001.676 402.336,1001.676 401.625,1000.965 401.625,999.949 401.32,999.644 397.459,999.644 v1(394.943,997.128)
NetR125_2: R125.2 U9.96 | length 32.5
  Top Layer w0.25: R125.2@390,1027.5 390.837,1027.5 390.977,1027.641 393.548,1027.641 394.83,1026.359 394.83,1000.722 395.4,1000.152 U9.96@395.4,999.5
NetR126_2: R126.2 U9.95 | length 29.9
  Top Layer w0.25: U9.95@396.05,999.5 396.05,1000.804 395.334,1001.52 395.334,1026.594 396.24,1027.5 R126.2@397.5,1027.5
NetR127_2: R127.2 U9.93 | length 71.8
  Top Layer w0.25: R127.2@345,1017.5 344.17,1017.5 343.865,1017.195 343.865,1009.472 v1(351.46,1001.878) ; v1(396.57,997.212) 397.35,997.991 U9.93@397.35,999.5
  Bottom Layer w0.25: v1(351.46,1001.878) 362.532,1001.878 369.644,994.766 381.205,994.766 381.711,994.26 393.618,994.26 v1(396.57,997.212)
NetR128_2: R128.2 U9.90 | length 66.2
  Top Layer w0.25: v1(350.926,1017.499) 350.928,1017.5 R128.2@352.5,1017.5 ; U9.90@399.3,999.5 399.3,1002.792 399.708,1003.2 401.598,1003.2 v1(402.107,1002.69)
  Bottom Layer w0.25: v1(350.926,1017.499) 356.441,1011.984 366.95,1011.984 367.146,1012.18 382.575,1012.18 386.045,1008.71 397.217,1008.71 402.107,1003.82 v1(402.107,1002.69)
NetR129_2: R129.2 U9.34 | length 41.4
  Top Layer w0.25: v1(401.244,964.362) 401.25,964.368 U9.34@401.25,966.55 ; v1(436.277,963.568) 438.345,961.5 R129.2@439.25,961.5
  Bottom Layer w0.25: v1(401.244,964.362) 402.038,963.568 v1(436.277,963.568)
NetR130_2: R130.2 U9.33 | length 39.7
  Top Layer w0.25: U9.33@400.6,966.55 400.6,967.706 v1(400.609,967.715) ; v1(428.769,961.5) R130.2@433.5,961.5
  Bottom Layer w0.25: v1(400.609,967.715) 399.923,967.029 399.923,964.159 401.018,963.064 427.205,963.064 v1(428.769,961.5)
NetR131_2: R131.2 U9.89 | length 71.5
  Top Layer w0.25: v1(357.124,1014.247) 357.124,1016.179 358.445,1017.5 R131.2@360,1017.5 ; v1(399.161,996.823) 399.161,998.286 399.95,999.075 U9.89@399.95,999.5
  Bottom Layer w0.25: v1(357.124,1014.247) 357.355,1014.017 366.95,1014.017 367.778,1013.188 383.267,1013.188 383.532,1013.454 395.715,1013.454 404.448,1004.721 404.448,1000.459 403.037,999.048 400.304,999.048 399.161,997.905 v1(399.161,996.823)
NetR132_2: R132.2 U9.88 | length 43.7
  Top Layer w0.25: R132.2@367.5,1017.5 372.841,1017.5 373.371,1016.97 373.371,1014.663 v1(377.495,1010.539) ; U9.88@400.6,999.5 400.6,1000.65 v1(400.609,1000.658)
  Bottom Layer w0.25: v1(377.495,1010.539) 382.575,1010.539 386.34,1006.774 396.448,1006.774 398.975,1004.247 398.975,1002.292 v1(400.609,1000.658)
NetR133_2: R133.2 U9.87 | length 83.7
  Top Layer w0.25: R133.2@345,1027.5 346.456,1027.5 347.091,1026.865 347.091,1024.052 v1(348.285,1022.858) ; v1(400.742,997.839) 401.25,998.347 U9.87@401.25,999.5
  Bottom Layer w0.25: v1(348.285,1022.858) 350.545,1022.858 358.883,1014.521 370.037,1014.521 370.866,1013.692 374.58,1013.692 374.865,1013.978 396.971,1013.978 404.952,1005.997 404.952,999.951 402.84,997.839 v1(400.742,997.839)
NetR134_2: R134.2 U9.86 | length 77.7
  Top Layer w0.25: v1(350.59,1027.5) R134.2@352.5,1027.5 ; v1(400.609,1002.182) 401.9,1000.891 U9.86@401.9,999.5
  Bottom Layer w0.25: v1(350.59,1027.5) 347.269,1024.179 347.269,1019.124 349.91,1016.483 350.825,1016.483 356.913,1010.395 367.454,1010.395 368.735,1011.676 382.174,1011.676 386.105,1007.745 397.383,1007.745 399.479,1005.649 399.479,1003.312 v1(400.609,1002.182)
NetR135_2: R135.2 U9.85 | length 84.9
  Top Layer w0.25: R135.2@360,1027.5 360.813,1027.5 361.137,1027.176 v1(361.137,1019.835) ; v1(401.803,996.569) 402.55,997.316 U9.85@402.55,999.5
  Bottom Layer w0.25: v1(361.137,1019.835) 361.569,1020.267 373.054,1020.267 373.888,1019.434 373.888,1018.662 372.521,1017.295 371.856,1017.295 371.16,1016.599 371.16,1015.308 371.767,1014.7 373.253,1014.7 373.539,1014.986 397.979,1014.986 406.193,1006.773 406.193,997.098 404.368,995.274 403.098,995.274 v1(401.803,996.569)
NetR136_2: R136.2 U9.84 | length 63.4
  Top Layer w0.25: v1(365.15,1013.003) 364.924,1013.229 364.924,1024.206 367.208,1026.49 367.208,1027.5 R136.2@367.5,1027.5 ; U9.84@403.2,999.5 v1(403.2,1000.659)
  Bottom Layer w0.25: v1(365.15,1013.003) 366.127,1013.003 366.446,1012.684 383.503,1012.684 383.769,1012.95 395.107,1012.95 403.944,1004.113 403.944,1001.403 v1(403.2,1000.659)
NetR137_2: R137.2 U9.81 | length 37.1
  Top Layer w0.25: U9.81@405.15,999.5 405.15,1002.053 406.962,1003.865 437.95,1003.865 R137.2@437.95,1004.85
NetR138_2: R138.2 U9.80 | length 31.6
  Top Layer w0.25: U9.80@408.95,995.7 409.174,995.776 435.427,995.776 437.95,998.299 R138.2@437.95,999.85
NetR139_2: R139.2 U9.79 | length 29.2
  Top Layer w0.25: U9.79@408.95,995.05 409.824,995.272 411.63,995.272 412.052,994.85 R139.2@437.95,994.85
NetR140_2: R140.2 U9.78 | length 47.7
  Top Layer w0.25: U9.78@408.95,994.4 408.467,994.4 408.203,994.664 408.203,997.737 411.455,1000.989 438.912,1000.989 439.164,1000.737 439.164,992.239 437.95,991.025 R140.2@437.95,989.85
NetR141_2: R141.2 U9.76 | length 44.8
  Top Layer w0.25: v1(406.781,993.8) 407.481,993.1 U9.76@408.95,993.1 ; R141.2@437.95,984.85 437.95,986.565 439.62,988.235 439.62,991.688 v1(440.182,992.249)
  Bottom Layer w0.25: v1(406.781,993.8) 407.845,992.736 439.695,992.736 v1(440.182,992.249)
NetR142_2: R142.2 U9.75 | length 35.4
  Top Layer w0.25: U9.75@408.95,992.45 410.367,992.45 v1(411.658,991.159) ; v1(425.704,990.981) 428.882,990.981 437.95,981.913 R142.2@437.95,979.85
  Bottom Layer w0.25: v1(411.658,991.159) 425.526,991.159 v1(425.704,990.981)
NetR143_2: R143.2 U9.74 | length 76.2
  Top Layer w0.25: U9.74@408.95,991.8 406.732,991.8 405.257,993.275 405.257,995.705 411.709,1002.157 438.48,1002.157 439.877,1000.76 439.877,994.105 441.452,992.53 441.452,991.692 440.944,991.184 440.436,991.184 440.124,990.872 440.124,987.94 441.985,986.079 441.985,977.036 440.944,975.995 437.95,975.995 R143.2@437.95,974.85
NetR144_2: R144.2 U9.73 | length 43.3
  Top Layer w0.25: U9.73@408.95,991.15 410.1,991.15 v1(410.108,991.159) ; v1(427.177,989.967) 427.177,983.618 437.95,972.845 R144.2@437.95,969.85
  Bottom Layer w0.25: v1(410.108,991.159) 411.122,990.145 424.51,990.145 424.688,989.967 v1(427.177,989.967)
NetR145_2: R145.2 U9.70 | length 57.9
  Top Layer w0.25: v1(404.927,990.321) 406.527,990.321 407.648,989.2 U9.70@408.95,989.2 ; v1(447.95,1003.3) R145.2@447.95,1004.85
  Bottom Layer w0.25: v1(404.927,990.321) 404.927,993.978 405.816,994.867 408.076,994.867 409.702,993.242 431.013,993.242 441.071,1003.3 v1(447.95,1003.3)
NetR146_2: R146.2 U9.69 | length 52.4
  Top Layer w0.25: U9.69@408.95,988.55 410.101,988.55 v1(410.108,988.543) ; v1(446.913,986.638) 446.913,998.504 447.95,999.541 R146.2@447.95,999.85
  Bottom Layer w0.25: v1(410.108,988.543) 421.894,988.543 423.799,986.638 v1(446.913,986.638)
NetR147_2: R147.2 U9.68 | length 49.2
  Top Layer w0.25: v1(406.248,989.068) 407.416,987.9 U9.68@408.95,987.9 ; v1(447.95,993.288) R147.2@447.95,994.85
  Bottom Layer w0.25: v1(406.248,989.068) 409.411,992.232 438.503,992.232 439.676,991.059 441.734,991.059 443.963,993.288 v1(447.95,993.288)
NetR148_2: R148.2 U9.66 | length 47.8
  Top Layer w0.25: v1(406.248,986.638) 406.285,986.6 U9.66@408.95,986.6 ; v1(447.95,988.263) R148.2@447.95,989.85
  Bottom Layer w0.25: v1(406.248,986.638) 409.251,989.641 423.447,989.641 424.825,988.263 v1(447.95,988.263)
NetR149_2: R149.2 U9.65 | length 41.2
  Top Layer w0.25: U9.65@408.95,985.95 v1(410.108,985.95) ; v1(447.446,983.288) 447.45,983.292 R149.2@447.45,984.85
  Bottom Layer w0.25: v1(410.108,985.95) 444.785,985.95 v1(447.446,983.288)
NetR150_2: R150.2 U9.64 | length 47.8
  Top Layer w0.25: v1(406.772,984.504) 407.568,985.3 U9.64@408.95,985.3 ; v1(447.392,978.339) 447.45,978.396 R150.2@447.45,979.85
  Bottom Layer w0.25: v1(406.772,984.504) 411.714,984.504 412.461,985.251 415.036,985.251 415.96,984.326 441.405,984.326 v1(447.392,978.339)
NetR151_2: R151.2 U9.63 | length 45
  Top Layer w0.25: U9.63@408.95,984.65 412.874,984.65 v1(413.791,983.733) ; v1(447.192,973.023) 447.45,973.281 R151.2@447.45,974.85
  Bottom Layer w0.25: v1(413.791,983.733) 414.299,983.225 416.403,983.225 426.605,973.023 v1(447.192,973.023)
NetR152_2: R152.2 U9.62 | length 51.1
  Top Layer w0.25: U9.62@408.95,984 411.273,984 412.775,982.497 422.123,982.497 440.08,964.54 446.024,964.54 447.548,966.064 447.548,968.506 447.45,968.604 R152.2@447.45,969.85
NetR153_2: R153.2 U9.60 | length 45.5
  Top Layer w0.25: R153.2@408.45,944.35 407.413,944.35 405.867,945.896 405.867,968.407 404.75,969.524 404.75,970.101 403.071,971.781 403.071,980.103 405.668,982.7 U9.60@408.95,982.7
NetR154_2: R154.2 U9.59 | length 45
  Top Layer w0.25: U9.59@408.95,982.05 410.251,982.05 410.54,981.761 413.512,981.761 414.706,980.567 414.706,949.946 413.374,948.614 413.374,945.504 414.528,944.35 R154.2@415.95,944.35
NetR155_2: R155.2 U9.58 | length 107
  Top Layer w0.25: U9.58@408.95,981.4 405.226,981.4 403.708,979.881 403.708,971.856 405.257,970.307 405.257,969.899 406.654,968.502 406.654,953.008 409.6,950.062 409.6,942.746 405.867,939.013 405.867,925.576 407.062,924.38 424,924.38 425.094,925.474 425.094,927.608 424.053,928.649 422.656,928.649 420.853,930.453 420.853,942.039 423.164,944.35 R155.2@423.45,944.35
NetR156_2: R156.2 U9.57 | length 57
  Top Layer w0.25: U9.57@408.95,980.75 v1(410.108,980.75) ; v1(422.326,979.551) 422.326,952.017 429.993,944.35 R156.2@430.95,944.35
  Bottom Layer w0.25: v1(410.108,980.75) 410.108,981.581 413.274,984.747 414.528,984.747 415.456,983.818 418.059,983.818 v1(422.326,979.551)
NetR157_2: R157.2 U9.55 | length 63.5
  Top Layer w0.25: R157.2@408.45,935.85 409.905,935.85 410.337,936.282 v1(410.337,965.251) ; U9.55@408.95,979.45 411.632,979.45 v1(412.648,978.433)
  Bottom Layer w0.25: v1(410.337,965.251) 419.608,965.251 421.665,967.308 421.665,971.575 420.014,973.226 417.855,973.226 v1(412.648,978.433)
NetR158_2: R158.2 U9.54 | length 57.5
  Top Layer w0.25: v1(407.648,978.916) 407.764,978.8 U9.54@408.95,978.8 ; R158.2@415.95,935.85 417.093,936.129 v1(417.093,979.553)
  Bottom Layer w0.25: v1(407.648,978.916) 409.931,978.916 412.779,981.764 414.882,981.764 v1(417.093,979.553)
NetR159_2: R159.2 U9.53 | length 57.8
  Top Layer w0.25: U9.53@408.95,978.15 410.841,978.15 v1(411.124,978.433) ; v1(419.633,974.748) 419.633,946.912 420.789,945.756 424.294,945.756 425.171,944.88 425.171,936.752 424.269,935.85 R159.2@423.45,935.85
  Bottom Layer w0.25: v1(411.124,978.433) 412.369,979.678 414.704,979.678 v1(419.633,974.748)
NetR160_2: R160.2 U9.52 | length 59.7
  Top Layer w0.25: v1(405.975,977.716) 406.192,977.5 U9.52@408.95,977.5 ; v1(420.649,969.442) 420.649,952.779 428.371,945.058 428.371,937.247 429.768,935.85 R160.2@430.95,935.85
  Bottom Layer w0.25: v1(405.975,977.716) 409.315,977.716 409.817,977.214 412.877,977.214 v1(420.649,969.442)
NetR161_2: R161.2 U9.50 | length 52.1
  Top Layer w0.25: v1(407.289,970.712) 411.855,966.146 411.855,932.757 409.448,930.35 R161.2@408.45,930.35 ; v1(407.797,976.198) 407.799,976.2 U9.50@408.95,976.2
  Bottom Layer w0.25: v1(407.289,970.712) 406.324,971.677 406.324,975.106 407.416,976.198 v1(407.797,976.198)
NetR162_2: R162.2 U9.49 | length 50.2
  Top Layer w0.25: U9.49@408.95,975.55 410.616,975.55 413.176,972.99 413.176,949.174 412.87,948.868 412.87,931.868 414.388,930.35 R162.2@415.95,930.35
NetR163_2: R163.2 U9.47 | length 65.6
  Top Layer w0.25: U9.47@408.95,974.25 409.466,974.25 412.672,971.044 412.672,949.678 412.366,949.372 412.366,925.882 413.364,924.884 422.879,924.884 424.586,926.592 424.586,927.35 R163.2@423.45,927.35
NetR164_2: R164.2 U9.44 | length 72.2
  Top Layer w0.25: U9.44@408.95,972.3 407.416,972.3 406.238,971.122 406.238,969.802 406.344,969.696 407.592,969.696 411.351,965.937 411.351,936.242 v1(409.448,934.339) ; v1(426.466,927.35) R164.2@430.95,927.35
  Bottom Layer w0.25: v1(409.448,934.339) 409.448,927.887 410.464,926.871 425.987,926.871 v1(426.466,927.35)
NetR165_2: R165.2 U9.40 | length 49.3
  Top Layer w0.25: U9.40@405.15,966.55 405.15,961.155 405.2,961.105 405.2,921.05 406.4,919.85 R165.2@408.45,919.85
NetR166_2: R166.2 U9.39 | length 83.9
  Top Layer w0.25: v1(403.682,959.637) 403.682,919.978 405.14,918.521 413.2,918.521 414.529,919.85 R166.2@415.95,919.85 ; v1(403.708,969.239) 404.5,968.446 U9.39@404.5,966.55
  Bottom Layer w0.25: v1(403.682,959.637) 403.682,960.976 402.602,962.056 401.474,962.056 399.388,959.97 397.055,959.97 395.328,961.697 395.328,967.767 397.993,970.432 402.514,970.432 v1(403.708,969.239)
NetR167_2: R167.2 U9.38 | length 67.1
  Top Layer w0.25: U9.38@403.85,966.55 403.85,961.498 404.696,960.651 404.696,920.117 405.788,919.025 412.447,919.025 414.255,920.832 418.677,920.832 419.659,919.85 R167.2@423.45,919.85
NetR168_2: R168.2 U9.37 | length 77.3
  Top Layer w0.25: U9.37@403.2,966.55 403.276,965.861 403.276,960.755 402.59,960.069 402.749,944.622 402.749,919.321 404.368,917.702 425.475,917.702 427.623,919.85 R168.2@430.95,919.85
NetR171_2: R171.2 U11.5 | length 10.2
  Top Layer w0.25: R171.2@315.5,897.5 315.5,896.62 316.182,895.938 316.564,895.938 317.754,897.128 317.754,900.214 U11.5@320,902.46
NetR172_2: R172.2 U11.3 | length 5.6
  Top Layer w0.25: R172.2@315.5,905 318.04,907.54 U11.3@320,907.54
NetR173_1: R173.1 U10.4 | length 6.2
  Top Layer w0.25: U10.4@293,930 296.124,930 297.5,928.624 R173.1@297.5,927.5
NetR174_1: R174.1 U11.4 | length 18.7
  Top Layer w0.25: U11.4@320,905 323,902 R174.1@323,887.5
NetR175_1: R175.1 U12.8 | length 29.1
  Top Layer w0.25: R175.1@300.5,937.5 300.5,934.364 307.416,927.448 307.416,926.592 308.559,925.449 314.471,925.449 U12.8@320,919.92
NetR176_1: R176.1 U12.6 | length 29.5
  Top Layer w0.25: R176.1@297.5,932.5 297.5,931.631 v1(299.009,930.123)
  Bottom Layer w0.25: v1(299.009,930.123) 299.009,925.322 299.72,924.611 319.634,924.611 319.634,925 U12.6@320,925
NetR177_1: R177.1 R178.2 U13.17 | length 102.3
  Top Layer w0.25: R178.2@472.5,1019.5 R178.2@472.872,1019.5 ; R177.1@480,1022.5 477.726,1022.5 474.726,1019.5 R178.2@472.872,1019.5 ; U13.17@492.5,948 491.209,948 490.687,947.478 487.586,947.478 482.956,942.848 481.127,942.848 477.411,946.564 477.411,982.734 474.396,985.749 474.396,1014.959 472.872,1016.483 R178.2@472.872,1019.5
NetR179_1: R179.1 R180.2 U14.17 | length 77
  Top Layer w0.25: R180.2@457.5,1022.5 459.74,1022.5 462.74,1019.5 R179.1@464.998,1019.5 ; R179.1@465,1019.5 R179.1@464.998,1019.5 ; v1(471.424,977.062) 471.424,982.345 469.163,984.606 469.163,990.651 464.998,994.816 R179.1@464.998,1019.5 ; v1(488.188,973.76) 489.913,973.76 491.653,975.5 U14.17@492.5,975.5
  Bottom Layer w0.25: v1(471.424,977.062) 484.886,977.062 v1(488.188,973.76)
NetR185_2: R185.2 R198.2 U16.15 | length 68.8
  Top Layer w0.25: v1(372.161,871.753) 372.161,864.743 374.4,862.504 R185.2@374.4,861.7 ; R198.2@387.4,879.2 387.4,878.332 388.086,877.646 v1(390.423,877.646) ; v1(398.78,871.042) 398.788,871.05 U16.15@400.95,871.05
  Bottom Layer w0.25: v1(372.161,871.753) 398.78,871.753 v1(398.78,871.042) 399.694,871.957 402.869,871.957 404.393,873.481 404.393,876.605 403.352,877.646 v1(390.423,877.646)
NetR186_2: R186.2 R200.2 U16.16 | length 49.9
  Top Layer w0.25: R186.2@374.4,854.2 374.4,852.424 374.933,851.891 382.46,851.891 385.279,854.71 385.279,868.017 v1(387.4,870.138) R200.2@387.4,871.7 ; U16.16@400.95,870.4 402.354,870.4 v1(402.844,870.89)
  Bottom Layer w0.25: v1(387.4,870.138) 387.537,870.001 401.955,870.001 v1(402.844,870.89)
NetR188_1: R188.1 U15.13 U16.9 | length 216.6
  Top Layer w0.25: v1(278.333,876.224) 279.324,875.233 279.324,864.057 279.197,863.93 279.197,862.214 280.949,860.461 280.949,855.039 282.448,853.54 U15.13@285,853.54 ; R188.1@369.9,889.2 369.9,887.984 370.256,887.628 v1(372.897,887.628) ; U16.9@405.4,877.45 405.4,876.284 v1(405.409,876.275)
  Bottom Layer w0.25: v1(278.333,876.224) 279.576,877.466 280.748,877.466 281.203,877.011 333.982,877.011 340.281,870.712 385.37,870.712 386.958,869.124 387.492,869.124 388.924,867.691 397.231,867.691 399.032,869.493 402.969,869.493 405.409,871.933 v1(405.409,876.275) 405.764,876.629 405.764,882.396 403.736,882.674 401.476,880.414 374.626,880.414 372.897,882.142 v1(372.897,887.628)
NetR189_1: R189.1 R204.2 | length 19.3
  Top Layer w0.25: R189.1@356.9,844.2 359.369,841.731 366.233,841.731 368.203,843.7 R204.2@374.4,843.7
NetR190_1: R190.1
NetR191_1: R191.1